# Altium PCB mchf_pro_rf.PcbDoc (part 2 of 3)
Units mil, origin at the board's own origin, x right, y up, seen from the top; angles counter-clockwise.
Board outline 7874.02 x 5512.23 mil, 2 copper layers (Top Layer, Bottom Layer); 347 components, 225 nets, 1009 pads, 443 vias.
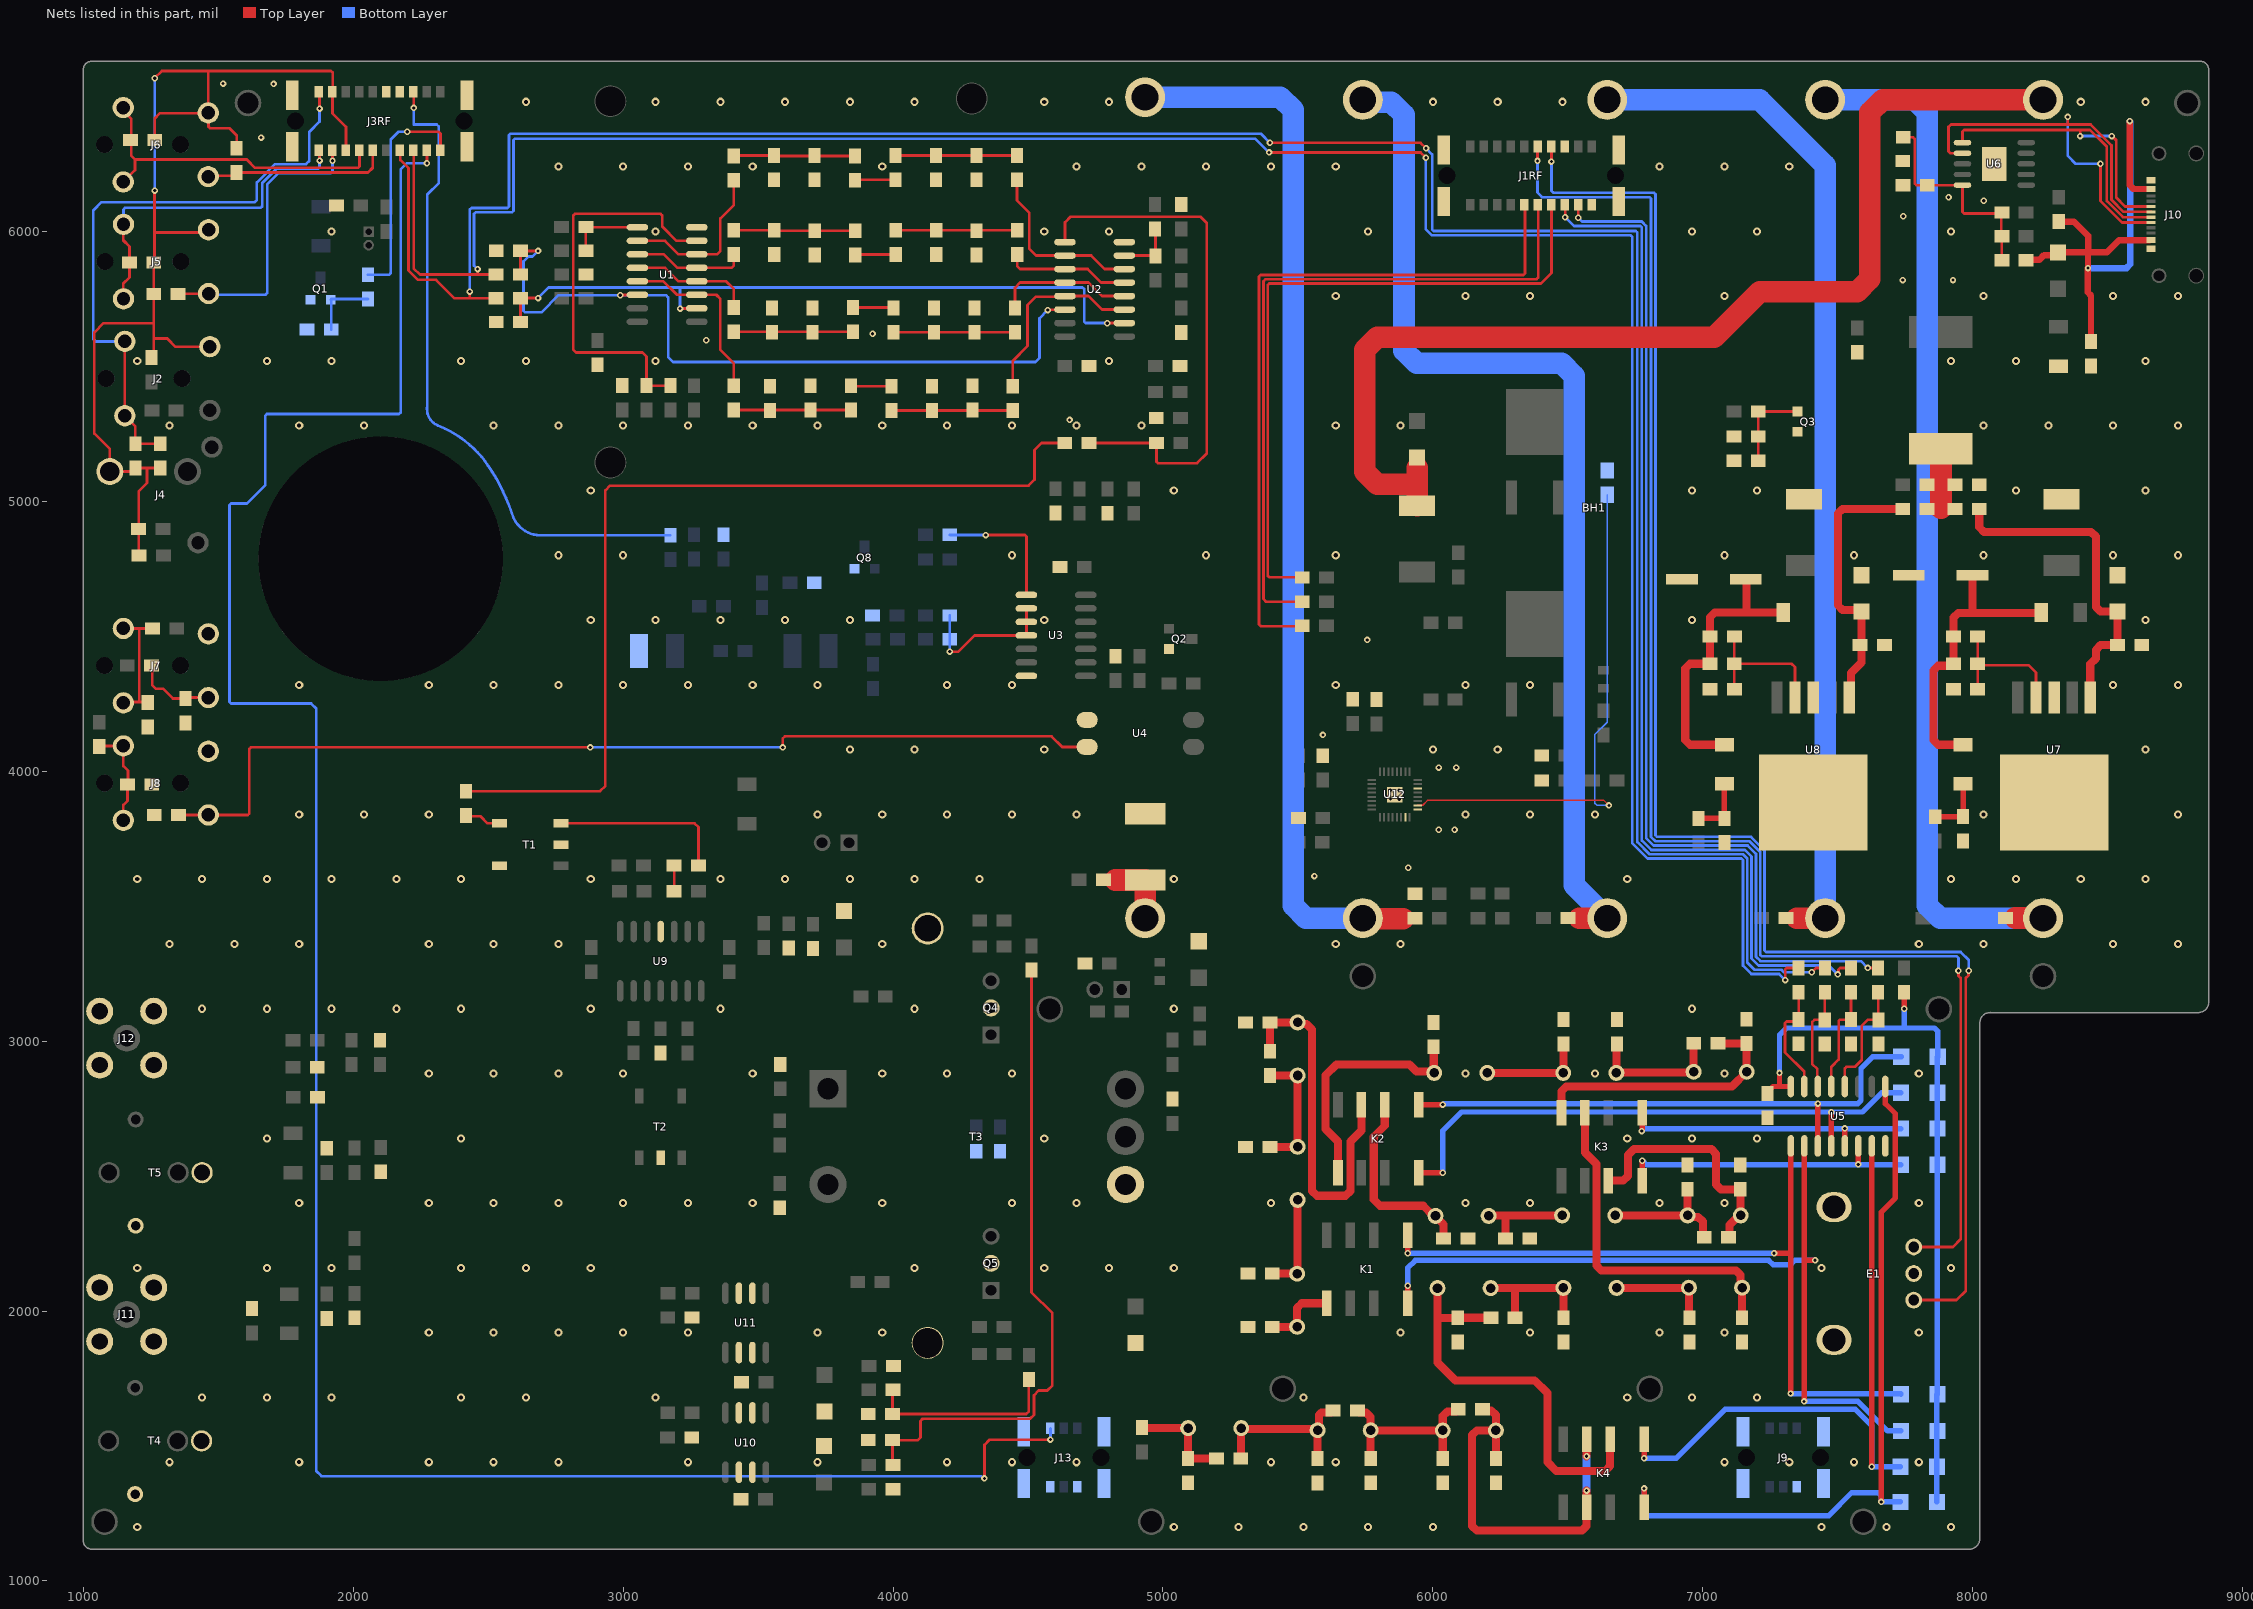
[diagram p2: the nets of this part, all layers, seen from the top]

## Part data
BH1: library part BATT_HOLDER_5S_21700, "LiOn 21700 5S Holder"
C1 C2 C3 C4 C5 C6 C7 C8 C9 C10 C11 C12 C13 C14 C15 C16 C17 C18 C19 C20 C21 C22 C23 C24 C25 C26 C27 C28 C29 C30 C31 C32 C33 C34 C35 C36 C37 C38 C38a C39 C40 C41 C42 C43 C44 C45 C46 C47 C76 C77 C91 C110 C111 C126 C127 C128 C129 C130: library part CAP, "Capacitor"
  C1 C2 C3 C4 C5 C6 C19 C20 C21 C22 C23 C24 C25 C26 C27 C28 C38 C38a C43 C44 C45 C46 C47 C76 C77 C91 C110 C111 C126 C127 C128: Price=0.068, QT Order=QCC-00154
  C7 C15: Notes=COG/NPO, Price=0.124, QT Order=QCC-00082
  C8 C16: Notes=COG/NPO, Price=0.074, QT Order=QCC-00147
  C9 C12 C17: Notes=COG/NPO, Price=0.078, QT Order=QCC-00125
  C10 C13 C18: Notes=COG/NPO, Price=0.058, QT Order=QCC-00084
  C11: Notes=COG/NPO, Price=0.074
  C14: Notes=COG/NPO, Price=0.074, QT Order=QCC-00069
  C29 C30 C31 C32 C33 C34 C35 C36 C37: Order="FN 185-6408", Price=0.01, QT Order=QCC-00259
  C39 C40 C41 C42: Price=0.01, QT Order=QCC-00259
  C129 C130: Price=0.115, QT Order=QCC-00103
C48 C49 C50 C51 C52 C53 C54 C55 C56 C57 C58 C59 C60 C61 C62 C63 C64 C65 C66 C67 C68 C69 C70 C71 C72 C73 C74 C75 C78 C79 C80 C82 C84 C85 C87 C89 C90 C92 C93 C94 C95 C97 C98 C99 C100 C101 C102 C103 C105 C106 C108 C109 C114 C115 C116 C117 C118 C119 C120 C121 C122 C123 C124 C125 C131 C132 C133 C134 C135 C136 C137: library part CAP, "Capacitor", Voltage=100V
  C48 C49 C50 C51 C52 C53 C54 C55 C56 C57 C58 C59 C60 C61 C62 C63 C64 C65 C71 C72 C73 C75: Notes=COG/NPO
  C66 C70: Notes=COG/NPO, Price=0.063, QT Order=QCC-00460
  C67 C68: Notes=COG/NPO, Price=0.143, QT Order=QCC-00142
  C69: Notes=COG/NPO, Price=0.068
  C74: Notes=COG/NPO, Price=0.078, QT Order=QCC-00125
  C78 C79 C80 C82 C84 C85 C87 C89 C90 C92 C93 C94 C95 C97 C98 C99 C100 C101 C102 C103 C105 C106 C108 C109 C114 C115 C116 C117 C132 C133 C134 C135: Price=0.068, QT Order=QCC-00154
  C131: Price=0.083
C81 C86 C104 C107: library part CAP-POL, "Electrolitic capacitor", Voltage=25V
  C81 C86 C107: Price=0.235, QT Order=QCC-00202
  C104: Price=0.204, QT Order=QCC-00166
C83 C88 C96 C112 C113: library part CAP-POL, "Electrolitic capacitor", Voltage=16V, Price=0.235, QT Order=QCC-00202
D1 D2 D5: "DIODE, SCHOTTKY, 1A, 60V, SOD-123F", Price=0.085, QT Order=QCD-00034
D3 D4 D6: library part PMEG6010CEH, "DIODE, SCHOTTKY, 1A, 60V, SOD-123F", Price=0.085, QT Order=QCD-00034
D7 D8: library part PMEG6010CEH, "RF DIODE SCHOTTKY 70V, SOD-123F", Order="DK 1N5711W-FDITR-ND", Price=0.085, QT Order=QCD-00034
D9 D10: "MELF & HIPAX PIN Diod", Order="DK 1465-1236-1-ND", Price=2.20
E1: library part Encoder, "ALPS Rotary Encoder"
F1 F2: library part Fuse, "Fuse", Function=Fuse, Price=0.134, QT Order=QCI-00216
HS1: library part RD16HHF1_DUAL_HEATSINK, "RF MOSFET x2 heatsink", Order="EB 121171160336", Price=7.375
J1RF J3RF: "SMD male connector, nominal current: 2.2 A, Test voltage: 840 VAC, number of positions: 20, pitch: 1.27 mm, color: black, contact surface: Gold, type of contact: Male connector, mounting: SMD soldering", Manufacturer_Name="Phoenix Contact", Mouser Part Number=651-1373866, Datasheet Link=http://www.phoenixcontact.com/gb/produkte/1373866, Geometry.Height=6.75mm, Manufacturer_Part_Number=1373866, Mouser Price/Stock=https://www.mouser.co.uk/ProductDetail/Phoenix-Contact/1373866?qs=2SLPxufLcgAs0enIXKjUUw%3D%3D
J2 J5 J6: library part MX-387GL, "Jack Socket,Thru-Hole", Order="FN 126-7376"
J4: library part PhoneJack, "Jack Socket 4 pin", Function=Phones, Order="FN 121-7016", Price=1.28
J7 J8: library part Phonejack3, "Jack Socket,Thru-Hole", Notes="post assembly", Price=0.35
  J7: Function=Paddles
  J8: Function=ACC
J9 J13: "SMD male connector, nominal current: 2.2 A, Test voltage: 840 VAC, number of positions: 6, pitch: 1.27 mm, color: black, contact surface: Gold, type of contact: Male connector, mounting: SMD soldering", Manufacturer_Name="Phoenix Contact", Mouser Part Number=651-1373826, Datasheet Link=http://www.phoenixcontact.com/gb/produkte/1373826, Geometry.Height=6.75mm, Manufacturer_Part_Number=1373826, Mouser Price/Stock=https://www.mouser.co.uk/ProductDetail/Phoenix-Contact/1373826?qs=2SLPxufLcgB13Clq%252BEBMrA%3D%3D
J10: "Universal Serial Bus (USB) Shielded I/O Receptacle, Type C, Vertical, Surface Mount, Height 8.8mm, 16 Circuits, Gold (Au) Flash Plating", Manufacturer_Name=Molex, Mouser Part Number=538-219320-0001, Datasheet Link=https://www.molex.com/content/dam/molex/molex-dot-com/products/automated/en-us/salesdrawingpdf/219/219320/2193200001_sd.pdf?inline, Geometry.Height=9.05mm, Manufacturer_Part_Number=219320-0001, Mouser Price/Stock=https://www.mouser.co.uk/ProductDetail/Molex/219320-0001?qs=rQFj71Wb1eXha8qVBIXu3A%3D%3D
J11 J12: library part BNC, "RF COAXIAL, BNC, JACK", Order="FN 171-2350", Price=0.69
K1 K2 K3 K4: "Single-winding Latching Relay", Order="FN 118-1070", Price=2.19
L1 L2 L3 L4 L5 L6 L7 L8 L9 L10 L11 L12: library part BPF_IND, "INDUCTOR SMD", Price=0.166
L13: library part LPF_IND, "T37-2 handwound inductor", Inductance=0.3uH, Notes="post assembly", Price=0.20
L14: library part LPF_IND, "T37-2 handwound inductor", Inductance=0.192uH, Notes="post assembly", Price=0.20
L15: library part LPF_IND, "T37-2 handwound inductor", Inductance=0.147uH, Notes="post assembly", Price=0.20
L16 L17: library part LPF_IND, "T37-2 handwound inductor", Inductance=0.9uH, Notes="post assembly", Price=0.20
L18: library part LPF_IND, "T37-2 handwound inductor", Inductance=0.55uH, Notes="post assembly", Price=0.20
L19 L21: library part LPF_IND, "T37-2 handwound inductor", Inductance=1.2uH, Notes="post assembly", Price=0.20
L20: library part LPF_IND, "T37-2 handwound inductor", Inductance=1.5uH, Notes="post assembly", Price=0.20
L22 L24: library part LPF_IND, "T37-2 handwound inductor", Inductance=2.1uH, Notes="post assembly", Price=0.20
L23: library part LPF_IND, "T37-2 handwound inductor", Inductance=4uH, Notes="post assembly", Price=0.20
L25 L27: library part LPF_IND, "T37-2 handwound inductor", Inductance=4.5uH, Notes="post assembly", Price=0.20
L26: library part LPF_IND, "T37-2 handwound inductor", Inductance=5.6uH, Notes="post assembly", Price=0.20
L28 L29 RFC1 RFC2 RFC3: library part TDK-NLV25T, "POWER INDUCTOR, 47UH, 1210", Notes="Power inductor", Price=0.166
M1 M2 M3 M4 M5 M6 M7 M8 M10 M11 M12 M13 M14 M15 M16 M17 M18 M19 M20 M21 M22 M23 R1 R2 R3 R4 R5 R6 R7 R8 R9 R10 R11 R12 R13 R14 R15 R16 R17 R18 R19 R20 R21 R22 R23 R24 R25 R26 R27 R28 R29 R30 R31 R32 R33 R34 R35 R36 R37 R38 R39 R40 R41 R42 R43 R44 R45 R46 R47 R48 R49 R50 R51 R52 R53 R54 R55 R56 R57 R58 R60 R61 R62 R63 R64 R65 R66 R67 R68 R69 R70 R71 R72 R73 R74 R75 R76 R77 R78 R79 R80 R81 R82 R83 R84 R85 R86: library part RES, "Resistor"
  M1 M2 M3 M4 M5 M6 M7 M8 M10 M11 M12 M13 M14 M15 M16 M17 M18 M19 M20 M21 M22 M23: Price=0.009, QT Order=QCR-00268
  R1 R2 R11 R12: Price=0.021, QT Order=QCR-00373
  R3 R4 R5 R6 R7 R8 R9 R10 R20 R35 R37 R41: Price=0.024, QT Order=QCR-00341
  R13 R14: Order="FN 146-9929", Price=0.021, QT Order=QCR-00365
  R15: Order="FN 933-2375", Price=0.027, QT Order=QCR-00301
  R16 R17 R18: Price=0.027, QT Order=QCR-00301
  R19 R42 R43 R44 R47 R48 R49 R57 R58 R60 R61: Price=0.061, QT Order=QCR-00579
  R21 R22 R23 R24 R25 R26 R27 R28: Price=0.017, QT Order=QCR-00427
  R29 R30 R31 R32 R33 R34 R77 R78: Notes="Tolerance better than 1%", Price=0.009
  R36: Order=71-CRCW08053K30FKEAC, Price=0.024, QT Order=QCR-00341
  R38: Order=667-ERJ-6GEYJ562V, Price=0.024, QT Order=QCR-00341
  R45 R46 R50 R51 R52 R53 R62 R63 R64 R65 R66 R83: Price=0.007, QT Order=QCR-00309
  R54: Price=0.013, QT Order=QCR-00279
  R55 R56 R80 R82: Price=0.046, QT Order=QCR-00333
  R67 R69 R71 R74 R75 R76: Price=0.046
  R68: Notes="Tolerance better than 1%", Order=652-CR2512AF/1R00ELF, Price=0.009, QT Order=QCR-00268
  R79 R81: Price=0.052, QT Order=QCR-00293
  R84 R85 R86: Price=0.012, QT Order=QCR-00339
M9 M121: library part Link, "Link", Published=8-Jun-2000, Publisher="Altium Limited", Revision="July-2002: Re-released for DXP Platform."
P1: library part MHDR1X2, "Header, 2-Pin", LatestRevisionDate=17-Jul-2002, LatestRevisionNote="Re-released for DXP Platform.", Publisher="Altium Limited"
Q1 Q2 Q3 Q8: library part MOSFET-N, "N-Channel MOSFET", Price=0.231, QT Order=QCT-00022, QT Price=0.28
Q4 Q5: "Silicon RF Power MOS FET", Order="EB 121171160336", Price=7.375
Q6 Q7: "N-Channel Enhancement Mode Field Effect Transistor, TO-252", Order="FN 108-1300", Price=0.161
RFC4 RFC5: library part FER_BEAD, "BN43-2402 1t choke", Notes="post assembly", Price=0.298
RFC6 RFC7: library part TDK-NLV25T, "INDUCTOR, SIGNAL LINE, 4.7UH, 1005", Price=0.166
RFC8 RFC9 RFC10 RFC11 RFC12: library part TDK-NLV25T, "INDUCTOR, SIGNAL LINE, 47UH, 1005", Price=0.166
T1 T2: "Transformer 4:1", Price=0.298
T3: library part PA_OUT_TR, "1:3 BN-43-3312 transformer", Notes="post assembly", Price=0.534
T4 T5: library part SWR_TR, "SWR Bridge transformer", Notes="post assembly", Price=0.795
TF1: library part FAN5V, "5V Turbine Fan, 40x40mm", Order="FN 118-1070", Price=2.19
U1 U2: "Dual 4:1 Demux/Analog Switch", Price=0.69
U3: "Quad 2-input NOR gate", Price=0.38, QT Order=QCI-01079
U4: library part ISP817XSM, "OPTOCOUPLER, SMDIP-4, TR O/P", Notes="v 0.6 RF board opto can do, but more expensive", Order="FN 168-3292", Price=0.26
U5: "BCD DECODER/DRIVER", Price=1.22
U6: "USB-PD trigger chip", Order="DK 336-2518-ND", Price=8.72
U7 U8: "V REG ADJ +5/20V, SMPS TO-263-5", Notes="In bulk from Ali", Price=1.28
U9: "Dual Wideband, High Output Current / Operational Amplifier with Current Limit", Price=0.38
U10 U11: "100 mA, Adjustable Output,  LDO Voltage Regulator with  60 V Load Dump Protection", Price=0.39
U12: "Hardware", Manufacturer_Name="Texas Instruments", Mouser Part Number=595-BQ40Z80RSMR, Arrow Part Number=BQ40Z80RSMR, Arrow Price/Stock=https://www.arrow.com/en/products/bq40z80rsmr/texas-instruments, Datasheet Link=https://www.arrow.com/en/products/bq40z80rsmr/texas-instruments, Height=1mm, Manufacturer_Part_Number=BQ40Z80RSMR, Mouser Price/Stock=https://www.mouser.co.uk/ProductDetail/Texas-Instruments/BQ40Z80RSMR?qs=%252BEew9%252B0nqrAXLQXqHAvhdw%3D%3D

## Free pads (board coordinates)
  round 98.43 hole 78.74: 1(1078.74,1219.68) 1(1610.24,6475.59) 1(4580.15,3118.62) 1(4956.69,1219.68) 1(5443.96,1712.6) 1(5740.47,3240.42) 1(6803.62,1712.6) 1(7594.49,1219.68) 1(7874.57,3118.62) 1(8260.16,3240.43) 1(8795.11,6475.59)
  round 905.51 hole 905.51 unplated paste+0 mask+0: sp_cut(2102,4787)

## Via types
v1: diameter 30, hole 15, Top Layer to Bottom Layer, 263 vias
v2: diameter 24, hole 12, Top Layer to Bottom Layer, 180 vias

## Nets (pads, with @x,y where several pads share a name; then routed paths per layer and width w, separated by ;. In a path a pad name is that pad's centre, name@x,y a point inside that pad or via, vN(x,y) a via of type N, cw(c..) or ccw(c..) an arc to the next point about the centre after c; other vN are vias at no path point)
AGND: C30.1 C31.2 C32.2 C33.1 C34.1 C35.1 C36.1 C37.1 J2.S J3RF.A2 J3RF.A13 J4.S J5.S J6.S R14.2 | length 4400.7
  Top Layer w10: C32.2@1207,4799 1205,4801 C33.1@1205,4897 1205,5037 1236,5068 1236,5120 1239,5123 ; C31.2@1253,5532 1261,5540 1261,5603 ; v2(1264.55,6151.19) 1264,6150.64 1264,5996 ; v2(1264.55,6567.56) 1291.15,6594.16 1464.86,6594.16 ; C35.1@1265,6339 1265,6419 1283.04,6437.04 1461.06,6437.04 J6.S@1463,6438.98 1463.96,6438.02 1463.96,6387.86 1469.82,6382 1542,6382 1568,6356 C34.1@1568,6308 ; R14.2@1285,5123 1239,5123 ; J6.S@1458.78,6450 1463,6454.22 1463,6592.3 1464.86,6594.16 ; J5.S@1463.96,6004.91 1455.06,5996 1264,5996 ; J2.S@1468.96,5571.91 1342.09,5571.91 1311,5603 1261,5603 ; J3RF.A13@1973.07,6300.39 1972.98,6300.49 1972.98,6387.02 1923.03,6436.97 1923.03,6516.88 1923.79,6517.64 1923.79,6588.3 1917.93,6594.16 1464.86,6594.16 ; 1239,5123 C30.1@1193,5123 1180.24,5110.24 J4.S@1098.23,5110.24 1098.23,5193.17 1040.96,5250.43 1040.96,5625.96 1075,5660 1261,5660 ; 1261,5603 1261,5660 ; 1261,5660 C37.1@1261,5768 C36.1@1261,5884 1264,5887 1264,5996
  Bottom Layer w10: v2(1264.55,6151.19) v2(1264.55,6567.56)
ANT_RX_ON: R84.1 R85.1 U3.2 U3.3 U3.4 | length 542.9
  Top Layer w10: v2(4210,4443) 4242,4443 4302,4503 U3.4@4494,4503 U3.3@4494,4553 U3.2@4494,4603
  Bottom Layer w10: v2(4210,4443) R84.1@4210,4489 R85.1@4210,4577
ANT_TX_ON: R83.2 U3.1 | length 503
  Top Layer w10: v2(4343,4875) 4488.14,4875 4494,4869.14 U3.1@4494,4653
  Bottom Layer w10: R83.2@4210,4876 4211,4875 v2(4343,4875)
B1: M1.1 R1.1 U1.7 | length 1501.6
  Top Layer w10: M1.1@3175.08,5428.33 R1.1@3086.72,5428.33 3086.72,5536.29 3072,5551.02 2825.37,5551.02 2815.39,5561 2815.39,6059.14 2821.25,6065 3139.14,6065 3145,6059.14 3145,6018 3198,5965 U1.7@3273,5965
B2: M2.1 R11.2 U1.9 | length 279.1
  Top Layer w10: R11.2@2862,5928.29 M2.1@2862,6016 2863,6015 U1.9@3053,6015
B3: M4.2 R2.1 U2.7 | length 216.5
  Top Layer w10: U2.7@4856.78,5910.14 4970.86,5910.14 R2.1@4972,5909 4972,6007 M4.2@4970,6009
B4: M3.2 R12.2 U2.9 | length 1995.6
  Top Layer w10: U2.9@4636.78,5960.14 4636.78,6033.23 4657.55,6054 5139,6054 5162,6031 5162,5177 5126,5141 4981.86,5141 4976,5146.86 R12.2@4976,5215.61 4734.33,5215.61 4730.24,5219.7 M3.2@4726.24,5215.7
BAND0: J3RF.A18 M5.1 M14.1 | length 9192.1
  Top Layer w10: J3RF.A18@2223.07,6300.39 2224,6299.47 2224,5863.16 2247.2,5839.95 2461,5839.95 ; v2(2460.62,5860.16) 2461,5859.77 2461,5839.95 ; M5.1@2529.58,5839.95 2461,5839.95 ; v2(5392.76,6292.24) 5954.73,6292.24 v2(5973.97,6273) ; v2(7305,3226) 7305,3265.14 7310.86,3271 M14.1@7354.91,3271
  Bottom Layer w10: v2(2460.62,5860.16) 2447.73,5873.04 2447.73,6064.73 2453.59,6070.59 2588.13,6070.59 2593.99,6076.45 2593.99,6337.48 2599.85,6343.33 5341.67,6343.33 v2(5392.76,6292.24) ; v2(5973.97,6273) 5973.97,6007.23 5996.2,5985 6732.92,5985 6738.78,5979.14 6738.78,3732.6 6794.96,3676.41 7142.73,3676.41 7148.59,3670.55 7148.59,3279.56 7179.74,3248.4 7282.6,3248.4 v2(7305,3226)
BAND1: J3RF.A17 M6.1 M15.1 | length 9450.7
  Top Layer w10: J3RF.A17@2173.07,6300.39 2174.48,6298.98 2174.48,6264.37 2205,6233.85 2205,5854.88 2239.59,5820.28 2306.86,5820.28 2375.28,5751.87 2431.86,5751.87 M6.1@2529.58,5751.87 ; 2431.86,5752.03 2431.86,5776.86 v2(2432,5777) ; v2(5396,6328) 5954.46,6328 v2(5974.44,6308.02) ; v2(7403.54,3255.05) 7419.49,3271 M15.1@7452,3271
  Bottom Layer w10: v2(2432,5777) 2431.73,5777.27 2431.73,6080.39 2437.93,6086.59 2571.1,6086.59 2576.95,6092.45 2576.95,6356.02 2582.81,6361.88 5362.12,6361.88 v2(5396,6328) ; v2(5974.44,6308.02) 5996.97,6285.49 5996.97,6006.86 6002.82,6001 6751.3,6001 6757.16,5995.14 6757.16,3737.59 6802.34,3692.41 7149.36,3692.41 7164.59,3677.18 7164.59,3291.84 7192.02,3264.4 7291.21,3264.4 7300.56,3255.05 v2(7403.54,3255.05)
BAND2: J1RF.A3 M16.1 | length 3837.3
  Top Layer w10: J1RF.A3@6489.17,6098 6489.75,6097.42 v2(6489.75,6052.4) ; v2(7499.86,3246.89) 7502.54,3249.57 7502.54,3264.68 7508.86,3271 M16.1@7549,3271
  Bottom Layer w10: v2(6489.75,6052.4) 6522.56,6019.6 6768.14,6019.6 6774,6013.74 6774,3743.37 6808.96,3708.41 7155.98,3708.41 7180.59,3683.81 7180.59,3306.02 7206.2,3280.4 7466.35,3280.4 v2(7499.86,3246.89)
BAND3: J1RF.A2 M17.1 | length 3863.5
  Top Layer w10: v2(6538.66,6050) 6538.66,6094.2 6537.01,6095.84 J1RF.A2@6539.17,6098 ; v2(7610.67,3271) M17.1@7649.44,3271
  Bottom Layer w10: v2(6538.66,6050) 6551.96,6036.69 6773.68,6036.69 6790,6020.37 6790,3751.96 6817.55,3724.41 7165.98,3724.41 7196.59,3693.8 7196.59,3312.64 7212.83,3296.4 7585.27,3296.4 v2(7610.67,3271)
BIAS0: C114.2 R50.2 RFC6.2 | length 2419
  Top Layer w10: RFC6.2@4000,1429.32 3998,1431.32 C114.2@3998,1522.32 3999.24,1521.08 4090.52,1521.08 4101.45,1532 4101.45,1592.43 4110.02,1601 4507.55,1601 4521.83,1615.28 4521.83,1687.83 4539.61,1705.61 4571.28,1705.61 4590,1724.32 4590,1992 4513,2069 R50.2@4513,3263
BIAS1: C115.2 R51.2 RFC7.2 | length 717.6
  Top Layer w10: RFC7.2@4000,1708.32 3998,1706.32 C115.2@3998,1618.32 4493,1618.32 4503,1628.32 R51.2@4503,1746
BMS_IRQ: J1RF.A4 R76.2 | length 2530
  Top Layer w10: R76.2@5516.14,4718.21 5393.86,4718.21 5388,4724.07 5388,5800.77 5393.86,5806.63 6400.69,5806.63 6439.57,5845.51 6439.57,6097.61 J1RF.A4@6439.17,6098
BMS_SCL: J1RF.A6 R74.2 | length 2687.4
  Top Layer w10: R74.2@5516.14,4538.88 5514.27,4537 5363,4537 5356,4544 5356,5832.77 5361.86,5838.63 6335.13,5838.63 6340.99,5844.49 J1RF.A6@6340.99,6089.46
BMS_SDA: J1RF.A5 R75.2 | length 2618.4
  Top Layer w10: R75.2@5516.14,4627.7 5382.3,4627.7 5372,4638 5372,5815 5379.63,5822.63 6384.42,5822.63 6390.28,5828.49 J1RF.A5@6390.28,6097.61
BND0: C23.1 M5.2 U1.14 U2.14 | length 2903.6
  Top Layer w10: M5.2@2619.58,5839.95 2619.91,5840.28 C23.1@2619.91,5928.2 2620.82,5927.29 v2(2685,5927.29) ; v2(2989.17,5763.49) 2989.92,5764.24 3052.24,5764.24 U1.14@3053,5765 ; v2(4572.75,5708.45) 4573.59,5709.3 4635.93,5709.3 U2.14@4636.78,5710.14
  Bottom Layer w10: v2(2685,5927.29) 2664.52,5906.8 2648.8,5906.8 2631,5889 2631,5706 2636.86,5700.14 2697.14,5700.14 2760.49,5763.49 v2(2989.17,5763.49) 3158.51,5763.49 3167,5755 3167,5534.05 3184.8,5516.25 4526.99,5516.25 4542.15,5531.41 4542.15,5677.85 v2(4572.75,5708.45)
BND1: C24.1 M6.2 U1.2 U2.2 | length 2607.3
  Top Layer w10: C24.1@2619.91,5664.78 2619.58,5665.11 M6.2@2619.58,5751.87 2620.71,5753 v2(2685,5753) ; v2(3210.86,5713.94) 3211.38,5714.47 3272.47,5714.47 U1.2@3273,5715 ; v2(4793.38,5659.52) 4794,5660.14 U2.2@4856.78,5660.14
  Bottom Layer w10: v2(2685,5753) 2724.07,5792.07 3210.86,5792.07 ; v2(3210.86,5713.94) 3210.86,5792.07 ; v2(4793.38,5659.52) 4792.7,5660.2 4713.71,5660.2 4707.85,5666.05 4707.85,5786.21 4701.99,5792.07 3210.86,5792.07
CLK_42M: J3RF.A19 J13.B1 | length 8771.9
  Top Layer w10: J3RF.A19@2273.07,6300.39 2273.26,6300.21 v2(2273.26,6252.5) ; v2(4338.67,1380) 4338.67,1504.2 4358.23,1523.76 v2(4582.97,1523.76)
  Bottom Layer w10: v2(2273.26,6252.5) 2198.48,6252.5 2175.59,6229.61 2175.59,5328.92 2169.73,5323.06 1680.25,5323.06 1674.39,5317.2 1674.39,5059.9 1606.12,4991.63 1547.86,4991.63 1542,4985.77 1542,4256.86 1547.86,4251 1844,4251 1863,4232 1863,1408 1882.52,1388.48 4326.4,1388.48 4334.88,1380 v2(4338.67,1380) ; v2(4582.97,1523.76) J13.B1@4582.97,1565.24
DM: J10.A7 J10.B7 U6.5 | length 1512.2
  Top Layer w10: U6.5@7961.89,6328.74 7961.89,6369.72 7967.75,6375.58 8397.68,6375.58 ; v2(8397.46,6353) 8397.68,6353.23 8397.68,6375.58 ; v2(8515,6353) 8515.93,6353 8531.46,6337.47 8531.46,6125.03 8564.75,6091.73 J10.B7@8660.47,6091.73 ; J10.A7@8660.47,6052.36 8556.21,6052.36 8496.51,6112.07 8496.51,6313.49 8434.42,6375.58 8397.68,6375.58
  Bottom Layer w10: v2(8397.46,6353) v2(8515,6353)
DP: J10.A6 J10.B6 U6.4 | length 1814.9
  Top Layer w10: U6.4@7961.89,6289.37 7917.01,6289.37 7910.38,6296 7910.38,6387.36 7919.03,6396 8352,6396 ; v2(8352,6424) 8352,6396 ; v2(8472.98,6250.3) 8472.98,6112.97 8553.27,6032.68 J10.B6@8660.47,6032.68 ; J10.A6@8660.47,6072.05 8559.16,6072.05 8514.11,6117.09 8514.11,6318.52 8436.63,6396 8352,6396
  Bottom Layer w10: v2(8352,6424) 8352,6279.84 8381.55,6250.3 v2(8472.98,6250.3)
ENC_I: E1.A J1RF.A14 | length 5935.8
  Top Layer w10: J1RF.A14@6439.17,6314.54 J1RF.A14@6439.17,6314.54 v2(6439.21,6258.37) ; E1.A@7781.28,2040.64 7781.64,2041 7940,2041 7974,2075 7974,3234 7983.91,3243.91 7983.91,3259.91 v2(7985,3261)
  Bottom Layer w10: v2(6439.21,6258.37) 6439.21,6149.83 6446,6143.04 6818.5,6143.04 6824.36,6137.18 6824.36,3762.86 6830.22,3757 7178.64,3757 7228.59,3707.05 7228.59,3335.86 7234.44,3330 7955.14,3330 7985,3300.14 v2(7985,3261)
ENC_Q: E1.B J1RF.A15 | length 5744.5
  Top Layer w10: v2(6387.41,6261) 6387.41,6312.77 J1RF.A15@6389.17,6314.54 ; E1.B@7781.28,2237.49 7926.49,2237.49 7955,2266 7955,3234 7947,3242 v2(7947,3261)
  Bottom Layer w10: v2(6387.41,6261) 6387.41,6143.67 6404.42,6126.66 6802.14,6126.66 6808,6120.8 6808,3756.59 6824.18,3740.41 7172.6,3740.41 7212.59,3700.43 7212.59,3319.86 7218.44,3314 7941.14,3314 7947,3308.14 v2(7947,3261)
FAN_ON: J3RF.A20 R13.2 | length 842.7
  Top Layer w10: v2(2200,6369) 2316,6369 2323.07,6361.93 J3RF.A20@2323.07,6300.39
  Bottom Layer w10: R13.2@2055,5839 2133.14,5839 2139,5844.86 2139,6341 2167,6369 v2(2200,6369)
GND: BH1.11 C1.2 C2.2 C7.2 C8.2 C9.1 C10.1 C15.2 C16.2 C17.1 C18.1 C23.2 C24.2 C25.2 C26.2 C27.2 C28.2 C29.2 C38.2 C38a.2 C39.2 C40.1 C41.2 C42.1 C43.2 C44.1 C45.1 C46.1 C47.1 C48.1 C50.1 C51.1 C53.1 C55.1 C56.1 C57.1 C58.1 C60.1 C61.1 C62.1 C63.1 C65.1 C66.2 C67.2 C68.2 C70.2 C71.2 C72.2 C73.2 C75.2 C76.1 C77.2 C78.1 C79.1 C80.2 C81.2 C83.2 C84.2 C85.2 C86.2 C88.2 C89.2 C90.2 C94.1 C95.1 C96.2 C101.1 C103.2 C104.2 C105.1 C106.1 C107.2 C108.2 C109.2 C110.2 C111.1 C112.2 C113.2 C114.1 C115.1 C116.1 C117.2 C122.2 C123.1 C124.1 C125.2 C126.2 C127.1 C128.2 C129.1 C130.2 C132.1 C133.2 C135.1 D2.1 D3.1 D4.1 D10.1 E1.1 E1.2 E1.C HS1.1 HS1.2 J1RF.A1 J1RF.A13 J1RF.MP1 J1RF.MP2 J1RF.MP3 J1RF.MP4 J3RF.A6 J3RF.A7 J3RF.MP1 J3RF.MP2 J3RF.MP3 J3RF.MP4 J7.S J8.S J9.B1 J9.MP1 J9.MP2 J9.MP3 J9.MP4 J10.A1 J10.A12 J10.B1 J10.B12 J11.2 J12.2 J13.A1 J13.A3 J13.MP1 J13.MP2 J13.MP3 J13.MP4 L1.1 L2.1 L3.1 L4.1 L9.1 L10.1 L11.1 L12.1 Q1.2 Q2.2 Q3.2 Q4.2 Q5.2 Q8.2 R3.1 R6.2 R7.1 R10.2 R33.1 R35.2 R37.2 R40.2 R42.1 R57.1 R58.1 R61.2 R68.2 R69.2 R78.2 R79.1 R80.1 R81.2 R82.2 T1.2 T1.6 T2.2 T3.5 T4.1 T4.5 T5.1 T5.5 U1.8 U2.8 U3.7 U4.3 U5.8 U6.0 U7.3 U8.3 U9.4 U10.2 U10.3 U10.6 U10.7 U11.2 U11.3 U11.6 U11.7 U12.7 U12.9 U12.14 U12.33
  other v1: 1200,1200 5040,1200 5280,1200 5520,1200 5760,1200 6000,1200 7440,1200 7680,1200 7920,1200 1320,1440 1800,1440 2280,1440 2520,1440 2760,1440 3240,1440 3720,1440 4200,1440 4440,1440 4680,1440 5400,1440 5640,1440 7080,1440 7320,1440 7560,1440 7800,1440 1440,1680 1680,1680 1920,1680 2400,1680 2640,1680 3120,1680 5520,1680 6720,1680 6960,1680 7200,1680 2280,1920 2520,1920 2760,1920 3000,1920 3240,1920 3720,1920 3960,1920 5880,1920 6360,1920 6840,1920 7080,1920 7800,1920 1200,2160 1680,2160 1920,2160 2400,2160 2640,2160 2880,2160 4080,2160 4560,2160 4800,2160 5040,2160 7440,2160 7920,2160 1800,2400 2280,2400 2520,2400 2760,2400 3000,2400 3240,2400 3480,2400 3960,2400 4440,2400 4680,2400 5400,2400 6120,2400 6360,2400 6840,2400 7080,2400 7800,2400 1680,2640 2400,2640 4560,2640 6720,2640 6960,2640 7200,2640 2280,2880 2520,2880 2760,2880 3000,2880 3480,2880 3960,2880 4200,2880 4440,2880 6120,2880 6600,2880 7080,2880 7800,2880 1440,3120 1680,3120 1920,3120 2160,3120 2400,3120 2880,3120 3360,3120 4080,3120 5040,3120 6960,3120 1320,3360 1560,3360 1800,3360 2280,3360 2520,3360 2760,3360 3960,3360 5640,3360 5880,3360 7800,3360 8040,3360 8520,3360 8760,3360 1200,3600 1440,3600 1680,3600 1920,3600 2160,3600 2400,3600 2880,3600 3360,3600 3600,3600 3840,3600 4080,3600 4320,3600 5040,3600 6720,3600 7920,3600 8160,3600 8400,3600 8640,3600 1800,3840 2040,3840 2280,3840 3720,3840 3960,3840 4200,3840 4440,3840 4680,3840 6120,3840 6360,3840 6600,3840 8040,3840 8760,3840 3840,4080 4080,4080 4560,4080 6000,4080 6240,4080 8640,4080 1800,4320 2280,4320 2520,4320 2760,4320 3000,4320 3240,4320 3480,4320 3720,4320 4200,4320 4440,4320 5640,4320 6120,4320 6360,4320 8520,4320 8760,4320 2880,4560 3120,4560 3360,4560 3600,4560 3840,4560 4560,4560 6960,4560 8640,4560 2760,4800 3000,4800 4440,4800 5160,4800 5640,4800 7080,4800 7560,4800 8040,4800 8520,4800 8760,4800 2880,5040 5040,5040 6960,5040 7200,5040 8160,5040 8640,5040 1320,5280 1800,5280 2040,5280 2520,5280 2760,5280 3000,5280 3240,5280 3480,5280 3720,5280 3960,5280 4200,5280 4440,5280 4680,5280 4920,5280 5640,5280 5880,5280 8040,5280 8280,5280 8520,5280 8760,5280 1200,5520 1680,5520 1920,5520 2400,5520 2640,5520 3120,5520 4800,5520 7920,5520 8160,5520 8640,5520 5640,5760 6120,5760 6360,5760 7080,5760 8040,5760 8520,5760 8760,5760 1920,6000 3120,6000 4560,6000 4800,6000 5760,6000 6960,6000 7200,6000 7920,6000 2760,6240 3000,6240 3240,6240 3480,6240 3960,6240 4680,6240 4920,6240 5160,6240 5400,6240 5640,6240 6840,6240 7080,6240 7320,6240 2640,6480 3120,6480 3360,6480 3600,6480 3840,6480 4080,6480 4560,6480 4800,6480 6000,6480 6240,6480 6480,6480 8400,6480 8640,6480
  other v2: 5561.07,3611.39 5909,3642 6021.45,3783.5 6080.33,3783.5 5875.01,3896.41 5842.49,3896.8 5842.32,3928.99 5874.8,3929.29 6021.45,4013.32 6086.81,4013.32 5592.68,4134.37 5756.78,4486.52 4654.1,5301.23 3308.32,5596.24 3924,5621 7740.49,5819.27 7926.7,5819.27 7742.18,6056.05 8041,6113 7910.38,6126.23 1658.87,6347.59 1705,6546.15 1517.75,6547.58
IMD3_TEST: C137.1 J3RF.A8 | length 2428.4
  Top Layer w10: J3RF.A8@2223.07,6516.93 2223.93,6516.07 v2(2223.93,6457.24)
  Bottom Layer w10: v2(2223.93,6457.24) 2223.93,6396.07 2309.24,6396.07 2317.07,6388.24 2317.07,6179.58 2274.26,6136.77 2274.26,5348.29 2273.26,5347.29 2273.26,5341.41 ccw(c2339.72,5341.41) 2320.33,5277.84 2320.74,5277.67 cw(c2169.16,4907.79) 2500.71,5131.1 cw(c1874.37,4709.06) 2594.52,4936.64 ; 2593,4939.91 ccw(c2694.97,4985.42) 2702.4,4874 C137.1@3175,4874
K1A: K1.1 R28.1 U5.1 | length 2815.6
  Top Layer w20: v2(5906.61,2214) K1.1@5906.61,2280.98 ; v2(7264.01,2214.17) 7325.96,2214.17 ; v2(7324.87,1694.58) 7324.87,1695.66 7325.96,1696.76 7325.96,2214.17 ; U5.1@7326,2611.83 U5.1@7326,2611.83 7325.96,2214.17
  Bottom Layer w20: v2(5906.61,2214) v2@7265.81,2214 ; v2@7324.87,1693.36 7732.64,1693.36 R28.1@7734,1692
K1K: K1.8 R27.1 U5.2 | length 3056.8
  Top Layer w20: K1.8@5906.61,2029.02 v2(5906.61,2094) ; v2(7375.03,1665.36) 7375.03,2188.27 ; U5.2@7376,2611.83 7375.03,2610.86 7375.03,2188.27 ; v2(7415.59,2188.27) 7375.03,2188.27
  Bottom Layer w20: v2(5906.61,2094) 5906.61,2159.81 5934.8,2188 7243.88,2188 7260.16,2171.72 7325.66,2171.72 7342.21,2188.27 v2(7415.59,2188.27) ; v2@7375.03,1665.55 7574.45,1665.55 7684,1556 R27.1@7734,1556
K2A: K2.1 R26.1 U5.3 | length 2087.8
  Top Layer w20: K2.1@5947.61,2763.98 5948.62,2765 v2(6036.07,2765) ; U5.3@7426,2611.83 7426,2768.41 v2(7426.39,2768.8)
  Bottom Layer w20: v2(6036.07,2765) 6037.16,2765 6040.65,2768.49 7574.28,2768.49 7586,2780.21 7586,2899 7629,2942 R26.1@7735,2942
K2K: K2.8 R25.1 U5.4 | length 2125.1
  Top Layer w20: K2.8@5947.61,2512.02 v2(6036.07,2512.02) ; U5.4@7476,2611.83 7476,2736.23 v2(7476.25,2736.47)
  Bottom Layer w20: v2(6036.07,2512.02) 6036.07,2667.36 6105.98,2737.26 7591.54,2737.26 7663.28,2809 R25.1@7734,2809
K3A: K3.1 R24.1 U5.5 | length 1097.1
  Top Layer w20: v2(6774,2667) 6774.77,2667.77 6774.77,2734.14 K3.1@6775.61,2734.98 ; v2(7525.77,2676.48) 7525.77,2612.06 U5.5@7526,2611.83
  Bottom Layer w20: v2(6774,2667) 6775.08,2667 6784.08,2676 R24.1@7734,2676
K3K: K3.8 R23.1 U5.6 | length 1107.2
  Top Layer w20: K3.8@6775.61,2483.02 v2(6775.61,2557) ; U5.6@7576,2611.83 7576.11,2611.72 v2(7576.11,2543.29)
  Bottom Layer w20: v2(6775.61,2557) 6776.69,2557 6791.69,2542 R23.1@7734,2542
K4A: K4.1 R22.1 U5.7 | length 2445.6
  Top Layer w20: v2(6782.21,1454.29) K4.1@6782.21,1525.97 ; v2(7626.08,1422.82) U5.7@7626.08,2594.47
  Bottom Layer w20: v2(6782.21,1454.29) 6900.86,1454.29 7082.41,1635.84 7565.15,1635.84 7626.08,1574.9 v2@7626.08,1423 ; v2(7626.08,1422.82) v2@7626.08,1423 ; R22.1@7732,1423 v2@7626.08,1423
K4K: K4.8 R21.1 U5.9 | length 2750.9
  Top Layer w20: K4.8@6782.21,1274 v2(6782.21,1343) ; v2(7661,1293) 7661,2367 7713,2419 7713,2731 7676,2768 U5.9@7676,2831.83
  Bottom Layer w20: v2(6782.21,1343) 6782.21,1253.7 6793.93,1241.99 7466.67,1241.99 7551.64,1326.95 7649.28,1326.95 7661,1315.24 v2(7661,1293) R21.1@7732,1293
"LINE IN L": C35.2 J3RF.A14 J6.T | length 1221.5
  Top Layer w10: J6.T@1148.04,6183.07 1191.43,6226.46 1191.43,6266.33 ; J6.T@1148.04,6458.66 1148.04,6446.39 1177.19,6417.25 C35.2@1177.19,6336.81 ; C35.2@1175,6339 C35.2@1177.19,6336.81 ; J3RF.A14@2023.07,6300.39 2023.44,6300.02 2023.44,6241.04 2017.58,6235.18 1636.7,6235.18 1605.55,6266.33 1191.43,6266.33 ; C35.2@1177.19,6336.81 1177.19,6280.57 1191.43,6266.33
"LINE IN R": C34.2 J3RF.A15 J6.R | length 688.2
  Top Layer w10: J6.R@1463,6202.76 1466.24,6206 1556,6206 C34.2@1568,6218 2054.96,6218 2072.47,6235.51 2072.47,6299.79 J3RF.A15@2073.07,6300.39
"LINE OUT L": C36.2 J3RF.A11 J5.T | length 1257.6
  Top Layer w10: J5.T@1149,5749 1148,5750 1148,5806 1171,5829 C36.2@1171,5884 1171,5944 1148,5967 1148,6024.59 J5.T@1149,6025.59 ; J3RF.A11@1873.07,6300.39 1875.16,6298.3 v2(1875.16,6262.05)
  Bottom Layer w10: J5.T@1149,6024.59 1149,6081.26 1154.86,6087.12 1657.24,6087.12 1663.1,6092.97 1663.1,6178.68 1716.73,6232.31 1869.3,6232.31 1875.16,6238.16 v2(1875.16,6262.05)
"LINE OUT R": C37.2 J3RF.A12 J5.R | length 1078.5
  Top Layer w10: C37.2@1351,5768 1351.69,5768.69 J5.R@1463.96,5768.69 ; J3RF.A12@1923.07,6300.39 1923.41,6300.06 1923.41,6261.99 v2(1923.3,6261.88)
  Bottom Layer w10: J5.R@1463.96,5768.69 1467.65,5765 1675.51,5765 1681.37,5770.86 1681.37,6174.32 1722.94,6215.89 1917.44,6215.89 1923.3,6221.75 v2(1923.3,6261.88)
MIC_IN: C30.2 J2.T J3RF.A1 R14.1 | length 2276.1
  Top Layer w10: J2.T@1154,5591.59 1154,5316 1193,5277 C30.2@1193,5213 R14.1@1285,5213 ; v2(1875.44,6454.99) 1875.44,6520.44 J3RF.A1@1877,6522
  Bottom Layer w10: J2.T@1154,5591.59 1046.48,5591.59 1037.21,5600.86 1037.21,6078.2 1067.01,6108 1635.22,6108 1643,6115.78 1643,6181.2 1710.77,6248.97 1824.97,6248.97 1837.12,6261.12 1837.12,6368.01 1875.44,6406.34 v2(1875.44,6454.99)
NetBH1_1: BH1.1 D6.1 F2.1 | length 4062.8
  Top Layer w80: D6.1@5941.23,4983.6 5941.23,5063 ; 5941.23,5123.77 5941.23,5063 ; BH1.1@8260.17,6487 7665.86,6487 7619,6440.14 7619,5823.33 7572.14,5776.46 7210.56,5776.46 7041.56,5607.46 5793.86,5607.46 5747,5560.6 5747,5109.86 5793.86,5063 5941.23,5063
NetBH1_2: BH1.2 BH1.3 R63.2 | length 3886.1
  Top Layer w80: 8157.94,3456 8259.68,3456 BH1.2@8260.17,3455.5
  Bottom Layer w80: BH1.3@7453.09,6487 7785.14,6487 7832,6440.14 7832,3502.37 7878.86,3455.5 BH1.2@8260.17,3455.5
NetBH1_4: BH1.4 BH1.5 R64.2 | length 3831.6
  Top Layer w80: 7347.16,3455.5 BH1.4@7453.09,3455.5
  Bottom Layer w80: BH1.5@6646,6487 7210,6487 7453.09,6243.91 BH1.4@7453.09,3455.5 BH1.4@7453.09,3425.98
NetBH1_6: BH1.6 BH1.7 R65.2 | length 3882.2
  Top Layer w80: 6542,3455.5 BH1.6@6646,3455.5
  Bottom Layer w80: BH1.7@5740.49,6487 5748.94,6478.55 5846.14,6478.55 5893,6431.68 5893,5557.86 5939.86,5511 6477.14,5511 6524,5464.14 6524,3577.5 BH1.6@6646,3455.5
NetBH1_8: BH1.8 BH1.9 R66.2 | length 3943.2
  Top Layer w80: BH1.8@5740.49,3455.5 5741.87,3454.12 5889.6,3454.12
  Bottom Layer w80: BH1.9@4933.4,6496.84 5435.14,6496.84 5482,6449.98 5482,3502.37 5528.86,3455.5 BH1.8@5740.49,3455.5
NetBH1_10: BH1.10 R67.2 R68.1 | length 251.5
  Top Layer w80: 4824,3596.79 R68.1@4934,3596.79 4933.7,3596.49 4933.7,3455.8 BH1.10@4933.4,3455.5
NetBH1_12: BH1.12 U12.10 | length 1940.8
  Top Layer w6: U12.10@5943.47,3873.33 5944.41,3874.27 5962.38,3874.27 5979.88,3891.76 6633.57,3891.76 v2(6652,3873.33)
  Bottom Layer w6: BH1.12@6645.71,5024.22 6645.71,4181.71 6600,4136 6600,3881.53 6608.19,3873.33 v2(6652,3873.33)
NetC3_1: C3.1 C7.1 C11.1 L1.2 | length 435.4
  Top Layer w10: C3.1@3409.92,5338 3541.93,5338 L1.2@3543.64,5336.29 3545.35,5338 C7.1@3693.92,5338 C11.1@3843.92,5338
NetC3_2: C3.2 U1.3 U1.13 | length 676.6
  Top Layer w10: U1.13@3053,5815 3149,5815 3199,5765 U1.3@3273,5765 3345,5765 3360,5750 3360,5561 3409.92,5511.08 C3.2@3409.92,5428
NetC4_1: C4.1 C8.1 C12.1 L2.2 | length 450.9
  Top Layer w10: C4.1@3409.67,6004 C4.1@3410,6004.33 3410.33,6004 L2.2@3559.92,6004 3561.63,6002.29 C8.1@3709.64,6002.29 C12.1@3859.64,6002.29
NetC4_2: C4.2 U1.5 U1.11 | length 421.8
  Top Layer w10: U1.11@3053,5915 3151,5915 3201,5865 U1.5@3273,5865 3401,5865 3410,5874 C4.2@3410,5914.33
NetC5_1: C5.1 C9.2 C13.1 L3.2 | length 450.1
  Top Layer w10: C5.1@3410,6279.29 3411.71,6281 L3.2@3558.92,6281 3560.63,6279.29 3708.92,6279.29 C13.1@3858.64,6279.29
NetC5_2: C5.2 U1.6 U1.10 | length 615.5
  Top Layer w10: U1.10@3053,5965 3155,5965 3205,5915 U1.6@3273,5915 3347.71,5915 3360,5927.29 3360,6048 3410,6098 C5.2@3410,6189.29
NetC6_1: C6.1 C10.2 C14.1 L4.2 | length 443.8
  Top Layer w10: C6.1@3409.56,5628 3549.93,5628 L4.2@3551.64,5626.29 3553.35,5628 3701.64,5628 C14.1@3851.92,5628
NetC6_2: C6.2 U1.4 U1.12 | length 458.1
  Top Layer w10: U1.12@3053,5865 3155,5865 3205,5815 U1.4@3273,5815 3382,5815 3409.56,5787.44 C6.2@3409.56,5718
NetC11_2: C11.2 L5.1 | length 150.4
  Top Layer w10: C11.2@3843.92,5428 3845.63,5426.29 L5.1@3993.64,5426.29
NetC12_2: C12.2 L6.1 | length 151
  Top Layer w10: C12.2@3859.64,5912.29 3861.35,5914 L6.1@4009.92,5914
NetC13_2: C13.2 L7.1 | length 151
  Top Layer w10: C13.2@3858.64,6189.29 3860.35,6191 L7.1@4008.92,6191
NetC14_2: C14.2 L8.1 | length 150.4
  Top Layer w10: C14.2@3851.92,5718 3999.93,5718 L8.1@4001.64,5716.29
NetC15_1: C15.1 C19.2 L5.2 L9.2 | length 450
  Top Layer w10: L5.2@3993.64,5336.29 L9.2@4143.64,5336.29 C19.2@4443.64,5336.29
NetC16_1: C16.1 C20.2 L6.2 L10.2 | length 450
  Top Layer w10: L6.2@4009.92,6004 L10.2@4159.92,6004 C20.2@4459.92,6004
NetC17_2: C17.2 C21.2 L7.2 L11.2 | length 450
  Top Layer w10: L7.2@4008.92,6281 L11.2@4158.92,6281 C17.2@4308.92,6281 C21.2@4458.92,6281
NetC18_2: C18.2 C22.2 L8.2 L12.2 | length 450
  Top Layer w10: L8.2@4001.64,5626.29 L12.2@4151.64,5626.29 C18.2@4301.64,5626.29 C22.2@4451.64,5626.29
NetC19_1: C19.1 U2.3 U2.13 | length 716.1
  Top Layer w10: C19.1@4443.64,5426.29 4443.64,5520.64 4498.39,5575.39 4498.39,5726.87 4529.53,5758 4634.63,5758 U2.13@4636.78,5760.14 4723.86,5760.14 4773.86,5710.14 U2.3@4856.78,5710.14
NetC20_1: C20.1 U2.5 U2.11 | length 464.9
  Top Layer w10: C20.1@4459.92,5914 4459.92,5871.29 4471.06,5860.14 U2.11@4636.78,5860.14 4720.86,5860.14 4770.86,5810.14 U2.5@4856.78,5810.14
NetC21_1: C21.1 U2.6 U2.10 | length 657.9
  Top Layer w10: C21.1@4458.92,6191 4458.92,6114.08 4504,6069 4504,5936 4529.86,5910.14 U2.10@4636.78,5910.14 4733.86,5910.14 4783.86,5860.14 U2.6@4856.78,5860.14
NetC22_1: C22.1 U2.4 U2.12 | length 508.3
  Top Layer w10: C22.1@4451.64,5716.29 4451.64,5790.72 4471.06,5810.14 U2.12@4636.78,5810.14 4723.86,5810.14 4773.86,5760.14 U2.4@4856.78,5760.14
NetC29_1: C29.1 Q1.1 R13.1 | length 250.6
  Bottom Layer w10: C29.1@1918.68,5635.92 1918.68,5745.32 Q1.1@1917,5747 1919,5749 R13.1@2055,5749
NetC39_1: C39.1 J7.T R16.2 | length 472.9
  Top Layer w10: J7.T@1148.4,4253.15 1151.8,4256.55 1206.79,4256.55 ; J7.T@1148.4,4528.74 1206.79,4528.74 ; C39.1@1239,4254 1236.45,4256.55 1206.79,4256.55 ; R16.2@1256,4528.74 1206.79,4528.74 ; 1206.79,4256.55 1206.79,4528.74
NetC40_2: C40.2 J7.R R17.2 | length 300.6
  Top Layer w10: R17.2@1256,4390.94 1256,4318 1268,4306 1295,4306 1332,4269 C40.2@1378.51,4269 ; C40.2@1378.51,4272.83 J7.R@1463.36,4272.83
NetC41_1: C41.1 J8.T R18.2 | length 374.7
  Top Layer w10: R18.2@1059.35,4091.35 1061.7,4093.7 J8.T@1148.4,4093.7 ; J8.T@1148.4,3818.11 1148.4,3874.54 1163.86,3890 C41.1@1163.86,3950.64 1166,3952.78 1166,4002 1148.4,4019.6 J8.T@1148.4,4088.21
NetC42_2: C42.2 J8.R U4.4 | length 3662.2
  Top Layer w10: C42.2@1352.93,3837.11 1353.61,3837.8 J8.R@1463.36,3837.8 1609.14,3837.8 1615,3843.65 1615,4082.36 1620.86,4088.21 v2(2878.21,4088.21) ; v2(3591,4088.21) 3591,4120.35 3600,4129.35 4587.5,4129.35 4626.84,4090 U4.4@4719.15,4090
  Bottom Layer w10: v2(2878.21,4088.21) v2(3591,4088.21)
NetC43_1: C43.1 M13.1 R21.2 R22.2 R23.2 R24.2 R25.2 R26.2 R27.2 R28.2 U5.16 | length 2773.2
  Top Layer w20: C43.1@7239,2806 7239,2811 7259.83,2831.83 7280,2831.83 ; v2(7284,2882) 7284,2835.83 7280,2831.83 ; U5.16@7326,2831.83 7280,2831.83 ; M13.1@7745,3181 7745.5,3180.5 7745.5,3120.5 v2(7746,3120)
  Bottom Layer w20: v2(7284,2882) 7284,3023.44 7309.3,3048.73 7746,3048.73 ; v2(7746,3120) 7746,3048.73 ; R21.2@7867,1293 R22.2@7867,1423 7867,1690 R28.2@7869,1692 R23.2@7869,2542 R24.2@7869,2676 R25.2@7869,2809 7869,2941 R26.2@7870,2942 7870,3037.02 7858.28,3048.73 7746,3048.73
NetC44_2: C44.2 M17.2 U5.12 | length 443.4
  Top Layer w10: U5.12@7526,2831.83 7526,2899.14 7531.86,2905 7563.04,2905 7589,2930.96 7589,3057.14 7610.67,3078.81 C44.2@7650.96,3078.81 7649.44,3080.34 M17.2@7649.44,3181
NetC45_2: C45.2 M16.2 U5.13 | length 402.8
  Top Layer w10: U5.13@7476,2831.83 7476,2905 7503,2932 7503,3073.81 7508.86,3079.67 C45.2@7548.78,3079.67 7549,3079.89 M16.2@7549,3181
NetC46_2: C46.2 M15.2 U5.14 | length 400
  Top Layer w10: U5.14@7426,2831.83 7424,2833.83 7424,2896 7405,2915 7405,3070.14 7413.67,3078.81 C46.2@7451.78,3078.81 7452,3079.04 M15.2@7452,3181 M15.2@7451.78,3180.78
NetC47_2: C47.2 M14.2 U5.15 | length 421.9
  Top Layer w10: M14.2@7354.91,3181 7354.91,3080.75 C47.2@7354.69,3080.53 7347.16,3073 7309.86,3073 7304,3067.14 7304,2958.57 7376,2886.57 U5.15@7376,2831.83
NetC48_2: C48.2 C49.2 K4.3 K4.6 L13.1 | length 1411.3
  Top Layer w30: C49.2@6184,1636 6188,1632 6215.63,1632 6233.2,1614.43 L13.1@6233.2,1557.86 ; C48.2@6233.2,1454.18 6233.31,1454.29 6233.31,1557.75 L13.1@6233.2,1557.86 ; v2(6569,1335) 6569,1274.61 K4.6@6569.61,1274 6569.61,1204.31 6552.04,1186.74 6162.57,1186.74 6145,1204.31 6145,1540.29 6162.57,1557.86 L13.1@6233.2,1557.86 ; v2(6569,1462) 6569,1525.35 K4.3@6569.61,1525.97
  Bottom Layer w30: v2(6569,1335) v2(6569,1462)
NetC49_1: C49.1 C50.2 C51.2 C52.2 L13.2 L14.1 | length 704.4
  Top Layer w30: C52.2@5720,1632 5727.5,1624.5 5751.85,1624.5 5769.43,1606.93 L14.1@5769.43,1558.64 ; C51.2@5769.43,1454.18 L14.1@5769.43,1558.64 ; C50.2@6036.57,1454.18 L13.2@6036.57,1557.64 L13.2@6036.07,1558.14 ; C49.1@6094,1636 6086.5,1628.5 6054.15,1628.5 6036.57,1610.93 6036.57,1558.64 L13.2@6036.07,1558.14 ; L14.1@5769.43,1558.64 5769.93,1558.14 L13.2@6036.07,1558.14
NetC52_1: C52.1 C53.2 C54.2 L14.2 L15.1 | length 619.4
  Top Layer w30: C54.2@5288,1454.18 5289,1455.18 5289,1565.32 L15.1@5290,1566.32 5293.84,1562.48 L14.2@5568.73,1562.48 ; C53.2@5572.57,1453.32 L14.2@5572.57,1558.64 L14.2@5568.73,1562.48 ; C52.1@5630,1632 5622.5,1624.5 5587.57,1624.5 5578.13,1615.06 5578.13,1571.88 L14.2@5568.73,1562.48
NetC54_1: C54.1 C55.2 L15.2 M12.1 | length 388.8
  Top Layer w30: M12.1@4922,1568 4922.84,1567.16 5092.31,1567.16 L15.2@5093.15,1566.32 C55.2@5093.15,1454.18 C54.1@5198,1454.18
NetC56_2: C56.2 K1.5 L16.1 | length 279.5
  Top Layer w30: C56.2@5405,1941.57 L16.1@5496.64,1941.57 5496.64,2011.44 5514.21,2029.02 K1.5@5607.39,2029.02
NetC57_2: C57.2 L16.2 L17.1 | length 365.8
  Top Layer w30: C57.2@5405,2139 5405.29,2138.71 5496.35,2138.71 L16.2@5496.64,2138.43 5497.63,2139.42 5497.63,2410.58 L17.1@5498.62,2411.57
NetC58_2: C58.2 C59.2 L17.2 L18.1 | length 469.4
  Top Layer w30: C58.2@5395.98,2608.43 L17.2@5498.62,2608.43 L18.1@5498.62,2872.57 C59.2@5395.98,2872.57
NetC59_1: C59.1 C60.2 K2.3 L18.2 | length 1365
  Top Layer w30: C59.1@5395.98,2962.57 C60.2@5395.98,3069.43 L18.2@5498.62,3069.43 5504.18,3063.87 5531.35,3063.87 5552.48,3042.74 5552.48,2444.57 5570.05,2427 5676.43,2427 5694.01,2444.57 5694.01,2627.61 5735.01,2668.61 K2.3@5735.01,2763.98
NetC61_2: C61.2 K2.2 L19.1 | length 717.6
  Top Layer w30: K2.2@5821.62,2763.98 5821.62,2686.72 5780.62,2645.72 5780.62,2413.3 5803.92,2390 5964.06,2390 6001.7,2352.36 L19.1@6009.56,2352.36 6009.56,2351.2 6039.39,2321.37 C61.2@6039.39,2269
NetC62_2: C62.2 L19.2 L20.1 | length 357.5
  Top Layer w30: L19.2@6206.41,2352.36 6207.41,2353.36 6268.19,2353.36 ; C62.2@6268.68,2269 6268.68,2352.87 6268.19,2353.36 ; L20.1@6478.56,2354.36 6477.56,2353.36 6268.19,2353.36
NetC63_2: C63.2 C64.2 L20.2 L21.1 | length 487.5
  Top Layer w30: L20.2@6675.41,2354.36 L21.1@6943.56,2354.36 ; C63.2@6942.55,2451 6943.05,2450.5 6943.05,2354.87 L21.1@6943.56,2354.36 ; C64.2@7000,2275 7000,2331.23 6982.43,2348.8 6949.12,2348.8 L21.1@6943.56,2354.36
NetC64_1: C64.1 C65.2 K3.7 L21.2 | length 913.2
  Top Layer w30: K3.7@6649.62,2483.02 6705.02,2483.02 6723,2501 6723,2578 6745,2600 7031.43,2600 7049,2582.43 7049,2468.57 7066.57,2451 C65.2@7138.59,2451 7139.5,2450.09 7139.5,2355.27 L21.2@7140.41,2354.36 7134.44,2354.36 7099.36,2319.28 7099.36,2282.5 7091.86,2275 C64.1@7090,2275
NetC66_1: C66.1 K3.3 L22.1 | length 1293.4
  Top Layer w30: K3.3@6563.01,2734.98 6563.01,2587.37 6606,2544.37 6606,2168.19 6623.57,2150.62 7122.28,2150.62 7139.85,2133.04 7139.85,2092.2 L22.1@7145.41,2086.64 C66.1@7145.41,1975
NetC67_1: C67.1 L22.2 L23.1 | length 380.8
  Top Layer w30: L23.1@6680.43,2085.64 6680.93,2086.14 6948.06,2086.14 L22.2@6948.56,2086.64 6949.27,2085.93 6949.27,1975.71 C67.1@6949.98,1975
NetC68_1: C68.1 C69.2 L23.2 L24.1 | length 492
  Top Layer w30: L24.1@6213.83,2085 6214.15,2085.32 6300,2085.32 ; C69.2@6304.69,1975.22 6304.69,2080.63 6300,2085.32 ; C68.1@6483.57,1975 6483.57,2085 6483.26,2085.32 6300,2085.32
NetC69_1: C69.1 C70.1 K4.2 L24.2 | length 1536.2
  Top Layer w30: L24.2@6016.98,2085 6016.98,1975 ; C69.1@6214.69,1975.22 6214.58,1975.11 6092.11,1975.11 C70.1@6092,1975 6016.98,1975 ; K4.2@6656.23,1525.97 6656.23,1425.57 6638.65,1408 6457,1408 6424,1441 6424,1696.05 6377.05,1743 6083,1743 6016.98,1809.02 6016.98,1975
NetC71_1: C71.1 K2.5 L25.1 | length 909.6
  Top Layer w30: K2.5@5648.39,2512.02 5648.39,2627.61 5601.85,2674.15 5601.85,2873.53 5642.31,2914 5913.32,2914 5939.4,2887.92 5999.02,2887.92 L25.1@6003.14,2883.8 ; C71.1@6001.7,2979.43 6003.14,2977.99 L25.1@6003.14,2883.8 ; L25.1@6004.57,2882.36 L25.1@6003.14,2883.8
NetC72_1: C72.1 L25.2 L26.1 | length 388.9
  Top Layer w30: L25.2@6201.43,2882.36 L26.1@6482.78,2882.36 6483.07,2882.65 6483.07,2989.38 C72.1@6483.35,2989.67
NetC73_1: C73.1 C74.2 L26.2 L27.1 | length 505.2
  Top Layer w30: L26.2@6679.63,2882.36 L26.2@6680.81,2883.55 ; C73.1@6682,2990 6680.81,2988.81 L26.2@6680.81,2883.55 ; C74.2@6966,2992 6965.79,2991.79 6965.79,2886.57 L27.1@6965.57,2886.36 6967.64,2886.36 6968,2886 6966.36,2884.36 6681.63,2884.36 L26.2@6680.81,2883.55
NetC74_1: C74.1 C75.1 K3.4 L27.2 | length 1006.4
  Top Layer w30: K3.4@6476.39,2734.98 6476.39,2814.26 6493.97,2831.83 7107.9,2831.83 L27.2@7162.43,2886.36 7162.31,2886.47 7162.31,2990.74 C75.1@7162.2,2990.86 7161.63,2991.43 7056.57,2991.43 C74.1@7056,2992
NetC76_2: C76.2 F1.2 J10.A4 J10.A9 J10.B4 J10.B9 R29.2 R30.1 | length 2022.7
  Top Layer w24: R30.1@8197.76,5893.01 8199.95,5895.2 8247.2,5895.2 8264.06,5912.06 8306.06,5912.06 F1.2@8316,5922 8426.83,5922 ; R29.2@8318.45,6036.23 8374.45,6036.23 8427.19,5983.49 8427.19,5923.4 ; C76.2@8437.99,5591.39 8437.99,5762.01 8426,5774 8426,5863.18 v2(8426.83,5864) 8426.83,5922 ; v2(8581.11,6408.45) 8581.11,6170.89 8595.17,6156.83 J10.A4@8650.23,6156.83 ; J10.B4@8653.1,5967.74 8542.54,5967.74 8496.81,5922 8427.73,5922 8427.73,5923.94 8427.19,5923.4 ; 8426.83,5922 8426.83,5923.04 8427.19,5923.4
  Bottom Layer w24: v2(8426.83,5864) 8569.53,5864 8583.59,5878.06 8583.59,6405.97 v2(8581.11,6408.45)
NetC77_1: C77.1 R30.2 R31.2 R32.2 R34.2 U6.1 | length 813.1
  Top Layer w10: R31.2@7742.18,6348.63 7779.05,6348.63 7784.91,6342.77 7784.91,6176.75 7790.77,6170.89 C77.1@7831.18,6170.89 ; C77.1@7831,6170.89 7831,6171.26 U6.1@7961.89,6171.26 7961.89,6072 7967.75,6066.14 8105.81,6066.14 R32.2@8105.81,5978.64 ; R30.2@8107.76,5893.01 R32.2@8107.76,5981.87
NetC79_2: C79.2 M18.2 M19.2 R41.2 RFC1.2 | length 220.2
  Top Layer w80: RFC1.2@7881,5194.46 7882.1,5193.36 7882.1,4974.68
NetC80_1: C80.1 C81.1 M18.1 U7.1 | length 1257.7
  Top Layer w30: M18.1@8024,4971.4 8024,4903.98 8041.57,4886.41 8438.43,4886.41 8456,4868.84 8456,4608.8 8473.57,4591.22 C81.1@8535.86,4591.22 C81.1@8535.86,4591.22 8535.93,4467.07 C80.1@8536,4467 8473.57,4467 8456,4449.43 8456,4418 8435.09,4397.09 U7.1@8435.09,4273.06
NetC82_1: C82.1 R35.1 R36.2 U7.4 | length 517.7
  Top Layer w10: R35.1@8018,4303.5 R36.2@8018,4398 ; C82.1@8018,4499 R36.2@8018,4398 ; U7.4@8234.09,4273.06 8234.09,4365.91 8207,4393 8023,4393 R36.2@8018,4398
NetC82_2: C82.2 C83.1 L28.2 R36.1 RFC2.1 | length 1102.6
  Top Layer w30: RFC2.1@7964,4098 7871.57,4098 7854,4115.57 7854,4372.93 7871.57,4390.5 7920.5,4390.5 R36.1@7928,4398 C82.2@7928,4499 7928,4506 7928.5,4506.5 7928.5,4569.14 7946.07,4586.72 8000,4586.72 ; C83.1@7999.11,4726.22 7999.11,4587.61 8000,4586.72 ; L28.2@8253,4588 8244.28,4588 8243,4586.72 8000,4586.72
NetC84_1: C84.1 M20.2 RFC2.2 | length 224.7
  Top Layer w20: M20.2@7860.87,3831.23 7861.03,3831.4 7963.83,3831.4 C84.1@7964,3831.56 RFC2.2@7964,3953
NetC85_1: C85.1 C86.1 M19.1 U8.1 | length 1021.8
  Top Layer w30: U8.1@7542.6,4273.06 7548.6,4279.06 7548.6,4363.6 7587.87,4402.87 7587.87,4467 C86.1@7587.87,4591.22 7581.73,4597.36 7517.54,4597.36 7499.96,4614.93 7499.96,4954.27 7517.54,4971.85 M19.1@7740.49,4971.85
NetC87_1: C87.1 R37.1 R38.2 U8.4 | length 538.3
  Top Layer w10: R38.2@7116.35,4398 R38.2@7116.68,4398 ; R37.1@7116.68,4303.5 R38.2@7116.68,4398 ; C87.1@7116.68,4499 R38.2@7116.68,4398 ; U8.4@7341.6,4273.06 7341.6,4385.4 7329,4398 R38.2@7116.68,4398
NetC87_2: C87.2 C88.1 L29.2 R38.1 RFC3.1 | length 1090.9
  Top Layer w30: RFC3.1@7079.79,4098 6952.32,4098 6934.74,4115.57 6934.74,4380.43 6952.32,4398 R38.1@7026.35,4398 7026.68,4398.33 C87.2@7026.68,4499 7026.68,4570.43 7044.25,4588 7162,4588 ; C88.1@7158.91,4711 7162,4707.91 7162,4588 ; L29.2@7297.35,4588 7162,4588
NetC89_1: C89.1 M21.2 RFC3.2 | length 223.8
  Top Layer w20: M21.2@6983.78,3825 6983.94,3825.16 7079.62,3825.16 C89.1@7079.78,3825.33 RFC3.2@7079.79,3953
NetC90_1: C90.1 Q3.1 R39.2 R40.1 | length 327.5
  Top Layer w10: R40.1@7205.33,5150.19 7205,5150.52 R39.2@7205,5332 7205.61,5332.61 Q3.1@7350.34,5332.61
NetC91_1: C91.1 T1.4 | length 141.4
  Top Layer w10: C91.1@2418,3836 2415.26,3833.26 2470.74,3833.26 2497.26,3806.74 T1.4@2541.83,3806.74
NetC91_2: C91.2 M3.1 | length 3457.9
  Top Layer w10: C91.2@2418,3926 2914.26,3926 2934,3945.74 2934,5040 2952,5058 4502,5058 4524,5080 4524,5190 4549.7,5215.7 M3.1@4636.24,5215.7
NetC92_1: C92.1 T1.3 | length 657.4
  Top Layer w10: T1.3@2770.17,3806.74 3265,3806.74 3279,3792.74 C92.1@3279,3650
NetC92_2: C92.2 R45.2 | length 95
  Top Layer w10: R45.2@3189,3555 C92.2@3189,3650